# Altium PCB HX-SMJ-03-B.pcbdoc (part 1 of 2)
Units mil, origin at the board's own origin, x right, y up, seen from the top; angles counter-clockwise.
Board outline 10479.57 x 2985.31 mil, 2 copper layers (Top Layer, Bottom Layer); 242 components, 163 nets, 634 pads, 340 vias.
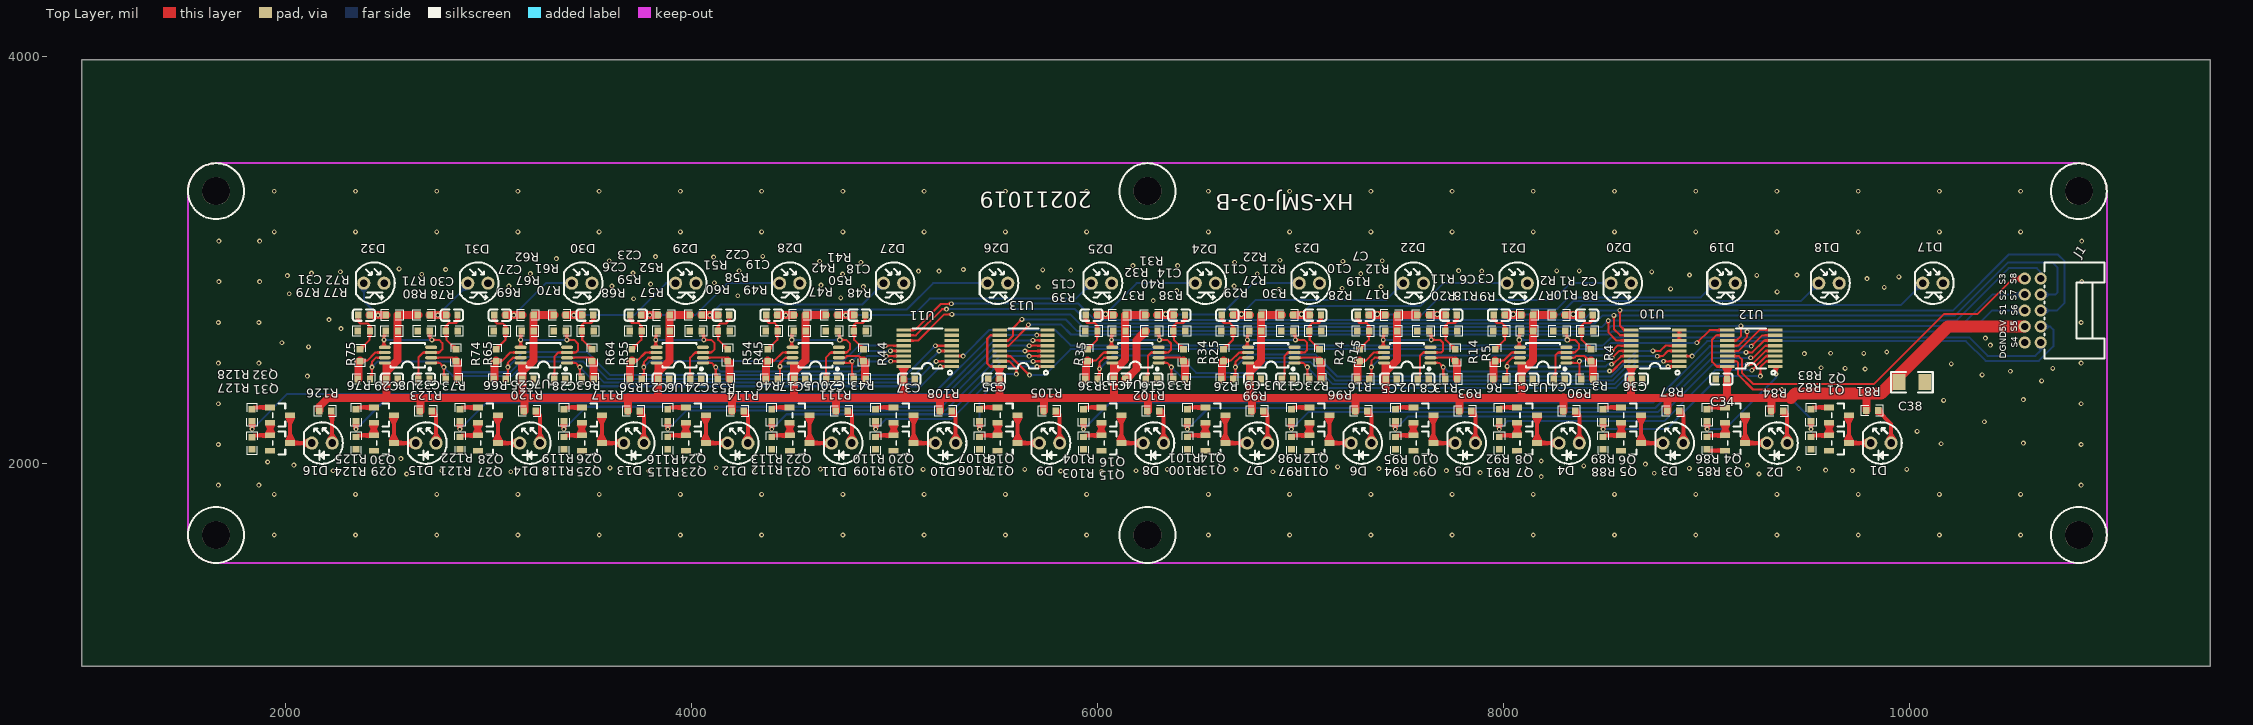
[diagram p0: Top Layer view]
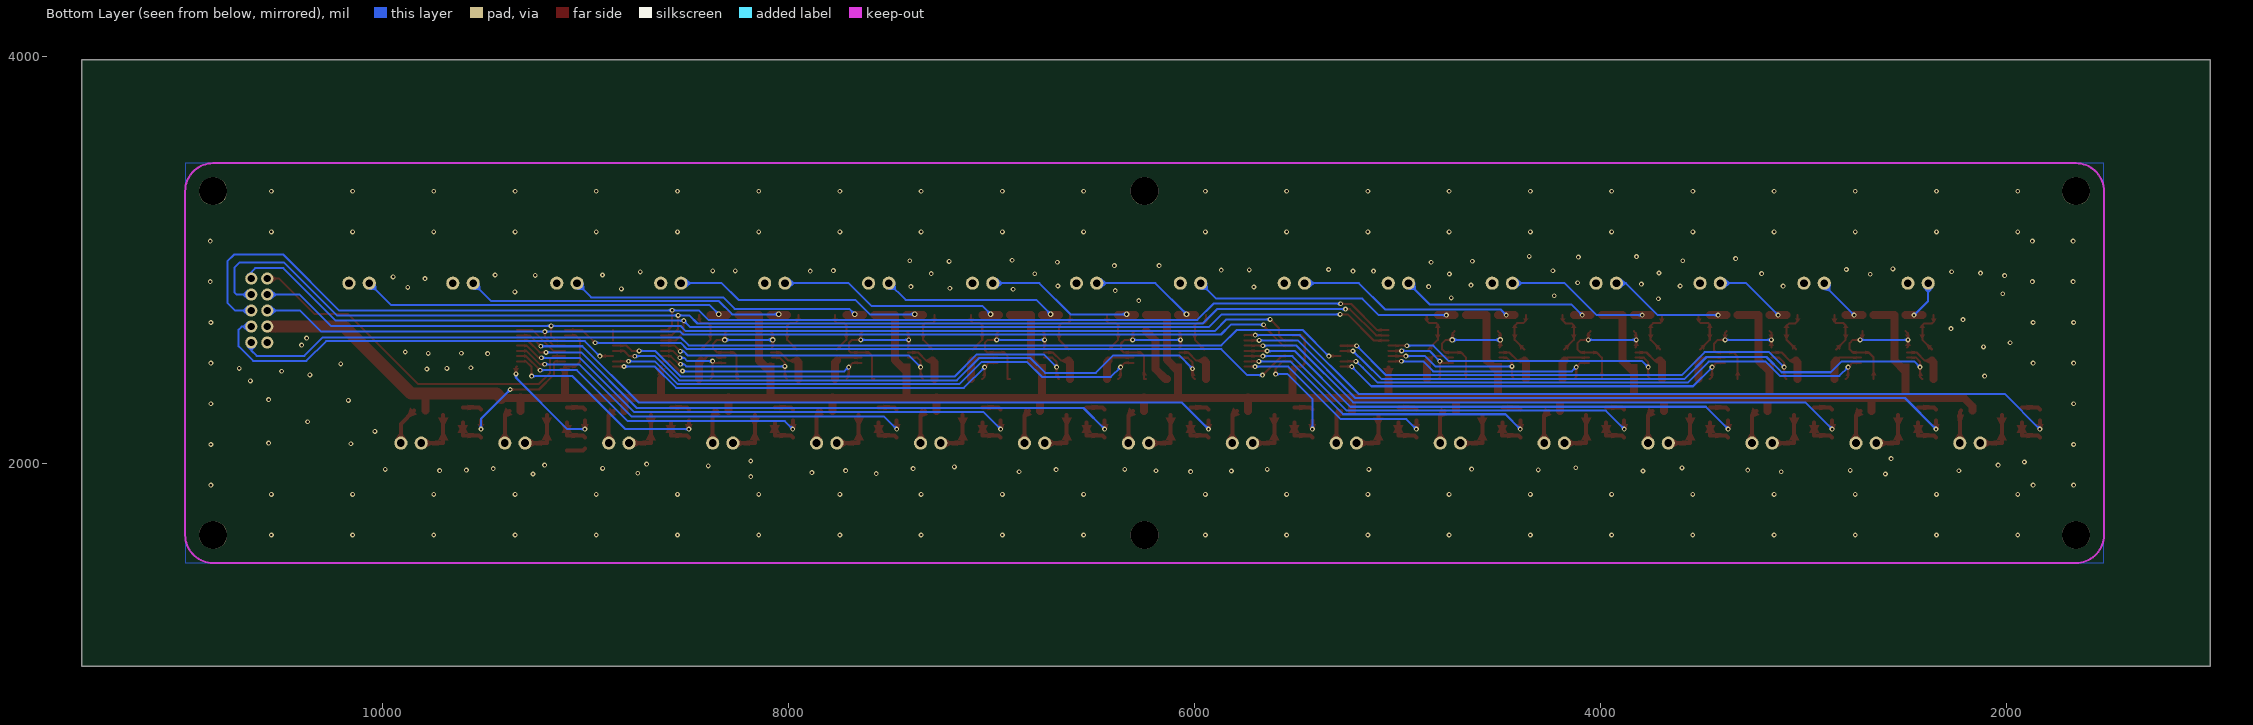
[diagram p1: Bottom Layer view, seen from below]

## Layer stack, top to bottom
Top Layer: signal copper (thickness not stored)
Dielectric: dielectric 12.6, FR-4, Dk 4.8
Bottom Layer: signal copper (thickness not stored)

## Board outline
11479.57,1000 1000,1000 1000,3985.31 11479.57,3985.31

## Components (designator, comment, footprint, x,y, rotation, side; value= is the part's Value field where it differs from the comment)
C1 "100nF" C0603 8117.07,2413.89 r0 top
C2 "1uF" C0603 8412.38,2728.89 r0 top
C3 "1uF" C0603 7979.27,2728.89 r0 top
C4 "100nF" C0603 8274.58,2413.89 r0 top
C5 "100nF" C0603 7447.77,2413.89 r0 top
C6 "1uF" C0603 7743.07,2728.89 r0 top
C7 "1uF" C0603 7309.98,2728.89 r0 top
C8 "100nF" C0603 7605.27,2413.89 r0 top
C9 "100nF" C0603 6778.48,2413.89 r0 top
C10 "1uF" C0603 7073.77,2728.89 r0 top
C11 "1uF" C0603 6640.68,2728.89 r0 top
C12 "100nF" C0603 6935.98,2413.89 r0 top
C13 "100nF" C0603 6109.18,2413.89 r0 top
C14 "1uF" C0603 6404.48,2728.89 r0 top
C15 "1uF" C0603 5971.38,2728.89 r0 top
C16 "100nF" C0603 6266.68,2413.89 r0 top
C17 "100nF" C0603 4534.38,2413.89 r0 top
C18 "1uF" C0603 4829.68,2728.89 r0 top
C19 "1uF" C0603 4396.57,2728.89 r0 top
C20 "100nF" C0603 4691.88,2413.89 r0 top
C21 "100nF" C0603 3865.07,2413.89 r0 top
C22 "1uF" C0603 4160.38,2728.89 r0 top
C23 "1uF" C0603 3727.28,2728.89 r0 top
C24 "100nF" C0603 4022.57,2413.89 r0 top
C25 "100nF" C0603 3195.88,2413.89 r0 top
C26 "1uF" C0603 3491.07,2728.89 r0 top
C27 "1uF" C0603 3058.07,2728.89 r0 top
C28 "100nF" C0603 3353.28,2413.89 r0 top
C29 "100nF" C0603 2526.57,2413.89 r0 top
C30 "1uF" C0603 2821.78,2728.89 r0 top
C31 "1uF" C0603 2388.68,2728.89 r0 top
C32 "100nF" C0603 2683.97,2413.89 r0 top
C34 "100nF" C0603 9073.27,2413.89 r0 top
C35 "100nF" C0603 5490.98,2413.89 r0 top
C36 "100nF" C0603 8656.27,2413.89 r180 top
C37 "100nF" C0603 5073.27,2413.89 r180 top
C38 "47uF" 1206 10011.39,2398.64 r180 top
D1 "IR333C-A" "IR-5MM/2.54-IR333C-A COPY" 9859.2,2098.93 r270 top
D2 "IR333C-A" "IR-5MM/2.54-IR333C-A COPY" 9347.41,2098.93 r270 top
D3 "IR333C-A" "IR-5MM/2.54-IR333C-A COPY" 8835.6,2098.93 r270 top
D4 "IR333C-A" "IR-5MM/2.54-IR333C-A COPY" 8323.81,2098.93 r270 top
D5 "IR333C-A" "IR-5MM/2.54-IR333C-A COPY" 7812.01,2098.93 r270 top
D6 "IR333C-A" "IR-5MM/2.54-IR333C-A COPY" 7300.2,2098.93 r270 top
D7 "IR333C-A" "IR-5MM/2.54-IR333C-A COPY" 6788.33,2098.93 r270 top
D8 "IR333C-A" "IR-5MM/2.54-IR333C-A COPY" 6276.51,2098.93 r270 top
D9 "IR333C-A" "IR-5MM/2.54-IR333C-A COPY" 5764.7,2098.93 r270 top
D10 "IR333C-A" "IR-5MM/2.54-IR333C-A COPY" 5252.9,2098.93 r270 top
D11 "IR333C-A" "IR-5MM/2.54-IR333C-A COPY" 4741.1,2098.93 r270 top
D12 "IR333C-A" "IR-5MM/2.54-IR333C-A COPY" 4229.28,2098.93 r270 top
D13 "IR333C-A" "IR-5MM/2.54-IR333C-A COPY" 3717.47,2098.93 r270 top
D14 "IR333C-A" "IR-5MM/2.54-IR333C-A COPY" 3205.66,2098.93 r270 top
D15 "IR333C-A" "IR-5MM/2.54-IR333C-A COPY" 2693.85,2098.93 r270 top
D16 "IR333C-A" "IR-5MM/2.54-IR333C-A COPY" 2182.03,2098.93 r270 top
D17 "PT334-6B" IR-5MM/2.54-PT334-6B 10115.11,2886.34 r270 top
D18 "PT334-6B" IR-5MM/2.54-PT334-6B 9603.3,2886.34 r270 top
D19 "PT334-6B" IR-5MM/2.54-PT334-6B 9091.52,2886.33 r270 top
D20 "PT334-6B" IR-5MM/2.54-PT334-6B 8579.62,2886.33 r270 top
D21 "PT334-6B" IR-5MM/2.54-PT334-6B 8067.82,2886.33 r270 top
D22 "PT334-6B" IR-5MM/2.54-PT334-6B 7556.02,2886.33 r270 top
D23 "PT334-6B" IR-5MM/2.54-PT334-6B 7044.22,2886.33 r270 top
D24 "PT334-6B" IR-5MM/2.54-PT334-6B 6532.42,2886.33 r270 top
D25 "PT334-6B" IR-5MM/2.54-PT334-6B 6020.62,2886.33 r270 top
D26 "PT334-6B" IR-5MM/2.54-PT334-6B 5508.82,2886.33 r270 top
D27 "PT334-6B" IR-5MM/2.54-PT334-6B 4997.02,2886.33 r270 top
D28 "PT334-6B" IR-5MM/2.54-PT334-6B 4485.22,2886.33 r270 top
D29 "PT334-6B" IR-5MM/2.54-PT334-6B 3973.32,2886.33 r270 top
D30 "PT334-6B" IR-5MM/2.54-PT334-6B 3461.52,2886.33 r270 top
D31 "PT334-6B" IR-5MM/2.54-PT334-6B 2949.72,2886.33 r270 top
D32 "PT334-6B" IR-5MM/2.54-PT334-6B 2437.92,2886.33 r270 top
J1 "PHB-2*5AW" CONN-TH_PHB-2*5AW 10606.37,2751.33 r270 top
Q1 "S9014" SOT-23(SOT-23-3) 9652.5,2098.93 r270 top
Q2 "S9014" SOT-23(SOT-23-3) 9652.5,2236.72 r270 top
Q3 "S9014" SOT-23(SOT-23-3) 9140.69,2098.93 r270 top
Q4 "S9014" SOT-23(SOT-23-3) 9140.69,2236.72 r270 top
Q5 "S9014" SOT-23(SOT-23-3) 8628.88,2098.93 r270 top
Q6 "S9014" SOT-23(SOT-23-3) 8628.88,2236.72 r270 top
Q7 "S9014" SOT-23(SOT-23-3) 8117.07,2098.93 r270 top
Q8 "S9014" SOT-23(SOT-23-3) 8117.07,2236.72 r270 top
Q9 "S9014" SOT-23(SOT-23-3) 7605.25,2098.93 r270 top
Q10 "S9014" SOT-23(SOT-23-3) 7605.26,2236.73 r270 top
Q11 "S9014" SOT-23(SOT-23-3) 7093.45,2098.93 r270 top
Q12 "S9014" SOT-23(SOT-23-3) 7093.45,2236.72 r270 top
Q13 "S9014" SOT-23(SOT-23-3) 6581.64,2098.93 r270 top
Q14 "S9014" SOT-23(SOT-23-3) 6581.64,2236.72 r270 top
Q15 "S9014" SOT-23(SOT-23-3) 6069.83,2098.93 r270 top
Q16 "S9014" SOT-23(SOT-23-3) 6069.83,2236.72 r270 top
Q17 "S9014" SOT-23(SOT-23-3) 5558.02,2098.93 r270 top
Q18 "S9014" SOT-23(SOT-23-3) 5558.02,2236.72 r270 top
Q19 "S9014" SOT-23(SOT-23-3) 5046.2,2098.93 r270 top
Q20 "S9014" SOT-23(SOT-23-3) 5046.2,2236.72 r270 top
Q21 "S9014" SOT-23(SOT-23-3) 4534.66,2098.94 r270 top
Q22 "S9014" SOT-23(SOT-23-3) 4534.4,2236.73 r270 top
Q23 "S9014" SOT-23(SOT-23-3) 4022.58,2098.93 r270 top
Q24 "S9014" SOT-23(SOT-23-3) 4022.58,2236.72 r270 top
Q25 "S9014" SOT-23(SOT-23-3) 3510.77,2098.93 r270 top
Q26 "S9014" SOT-23(SOT-23-3) 3510.77,2236.72 r270 top
Q27 "S9014" SOT-23(SOT-23-3) 2998.95,2098.93 r270 top
Q28 "S9014" SOT-23(SOT-23-3) 2998.96,2236.72 r270 top
Q29 "S9014" SOT-23(SOT-23-3) 2487.15,2098.93 r270 top
Q30 "S9014" SOT-23(SOT-23-3) 2487.15,2236.72 r270 top
Q31 "S9014" SOT-23(SOT-23-3) 1975.34,2098.93 r270 top
Q32 "S9014" SOT-23(SOT-23-3) 1975.34,2236.72 r270 top
R1 "8.2K" R0603 8274.58,2728.89 r0 top
R2 "8.2K" R0603 8117.07,2728.89 r180 top
R3 "100K" R0603 8412.38,2413.89 r0 top
R4 "1K" R0603 8431.98,2531.99 r90 top
R5 "1K" R0603 7959.57,2531.99 r270 top
R6 "100K" R0603 7979.27,2413.89 r0 top
R7 "24K" R0603 8117.07,2650.09 r0 top
R8 "100K" R0603 8412.38,2650.09 r180 top
R9 "100K" R0603 7979.27,2650.09 r0 top
R10 "3K" R0603 8274.58,2650.09 r180 top
R11 "8.2K" R0603 7605.27,2728.89 r0 top
R12 "8.2K" R0603 7447.77,2728.89 r180 top
R13 "100K" R0603 7743.07,2413.89 r0 top
R14 "1K" R0603 7762.77,2531.99 r90 top
R15 "1K" R0603 7290.27,2531.99 r270 top
R16 "100K" R0603 7309.98,2413.89 r0 top
R17 "24K" R0603 7447.77,2650.09 r0 top
R18 "100K" R0603 7743.07,2650.09 r180 top
R19 "100K" R0603 7309.98,2650.09 r0 top
R20 "3K" R0603 7605.27,2650.09 r180 top
R21 "8.2K" R0603 6935.98,2728.89 r0 top
R22 "8.2K" R0603 6778.48,2728.89 r180 top
R23 "100K" R0603 7073.77,2413.89 r0 top
R24 "1K" R0603 7093.48,2531.99 r90 top
R25 "1K" R0603 6620.98,2531.99 r270 top
R26 "100K" R0603 6640.68,2413.89 r0 top
R27 "24K" R0603 6778.48,2650.09 r0 top
R28 "100K" R0603 7073.77,2650.09 r180 top
R29 "100K" R0603 6640.68,2650.09 r0 top
R30 "3K" R0603 6935.98,2650.09 r180 top
R31 "8.2K" R0603 6266.68,2728.89 r0 top
R32 "8.2K" R0603 6109.18,2728.89 r180 top
R33 "100K" R0603 6404.48,2413.89 r0 top
R34 "1K" R0603 6424.18,2531.99 r90 top
R35 "1K" R0603 5951.68,2531.99 r270 top
R36 "100K" R0603 5971.38,2413.89 r0 top
R37 "24K" R0603 6109.18,2650.09 r0 top
R38 "100K" R0603 6404.48,2650.09 r180 top
R39 "100K" R0603 5971.38,2650.09 r0 top
R40 "3K" R0603 6266.68,2650.09 r180 top
R41 "8.2K" R0603 4691.88,2728.89 r0 top
R42 "8.2K" R0603 4534.38,2728.89 r180 top
R43 "100K" R0603 4829.68,2413.89 r0 top
R44 "1K" R0603 4849.38,2531.99 r90 top
R45 "1K" R0603 4376.88,2531.99 r270 top
R46 "100K" R0603 4396.57,2413.89 r0 top
R47 "24K" R0603 4534.38,2650.09 r0 top
R48 "100K" R0603 4829.68,2650.09 r180 top
R49 "100K" R0603 4396.57,2650.09 r0 top
R50 "3K" R0603 4691.88,2650.09 r180 top
R51 "8.2K" R0603 4022.57,2728.89 r0 top
R52 "8.2K" R0603 3865.07,2728.89 r180 top
R53 "100K" R0603 4160.38,2413.89 r0 top
R54 "1K" R0603 4180.07,2531.99 r90 top
R55 "1K" R0603 3707.57,2531.99 r270 top
R56 "100K" R0603 3727.28,2413.89 r0 top
R57 "24K" R0603 3865.07,2650.09 r0 top
R58 "100K" R0603 4160.38,2650.09 r180 top
R59 "100K" R0603 3727.28,2650.09 r0 top
R60 "3K" R0603 4022.57,2650.09 r180 top
R61 "8.2K" R0603 3353.28,2728.89 r0 top
R62 "8.2K" R0603 3195.88,2728.89 r180 top
R63 "100K" R0603 3491.07,2413.89 r0 top
R64 "1K" R0603 3510.78,2531.99 r90 top
R65 "1K" R0603 3038.38,2531.99 r270 top
R66 "100K" R0603 3058.07,2413.89 r0 top
R67 "24K" R0603 3195.88,2650.09 r0 top
R68 "100K" R0603 3491.07,2650.09 r180 top
R69 "100K" R0603 3058.07,2650.09 r0 top
R70 "3K" R0603 3353.28,2650.09 r180 top
R71 "8.2K" R0603 2683.97,2728.89 r0 top
R72 "8.2K" R0603 2526.57,2728.89 r180 top
R73 "100K" R0603 2821.78,2413.89 r0 top
R74 "1K" R0603 2841.47,2531.99 r90 top
R75 "1K" R0603 2369.07,2531.99 r270 top
R76 "100K" R0603 2388.68,2413.89 r0 top
R77 "24K" R0603 2526.47,2650.09 r0 top
R78 "100K" R0603 2821.78,2650.09 r180 top
R79 "100K" R0603 2388.68,2650.09 r0 top
R80 "3K" R0603 2683.97,2650.09 r180 top
R81 "91" R0603 9816.58,2258.69 r0 top
R82 "1K" R0603 9514.67,2098.89 r270 top
R83 "22K" R0603 9514.67,2236.69 r90 top
R84 "91" R0603 9347.38,2256.39 r0 top
R85 "1K" R0603 9002.88,2098.89 r270 top
R86 "22K" R0603 9002.88,2236.69 r90 top
R87 "91" R0603 8835.58,2256.39 r0 top
R88 "1K" R0603 8491.08,2098.89 r270 top
R89 "22K" R0603 8491.08,2236.69 r90 top
R90 "91" R0603 8323.77,2256.39 r0 top
R91 "1K" R0603 7979.27,2098.89 r270 top
R92 "22K" R0603 7979.27,2236.69 r90 top
R93 "91" R0603 7811.98,2256.39 r0 top
R94 "1K" R0603 7467.48,2098.89 r270 top
R95 "22K" R0603 7467.48,2236.69 r90 top
R96 "91" R0603 7300.18,2256.39 r0 top
R97 "1K" R0603 6955.68,2098.89 r270 top
R98 "22K" R0603 6955.68,2236.69 r90 top
R99 "91" R0603 6788.38,2256.39 r0 top
R100 "1K" R0603 6443.88,2098.89 r270 top
R101 "22K" R0603 6443.88,2236.69 r90 top
R102 "91" R0603 6276.48,2256.39 r0 top
R103 "1K" R0603 5932.07,2098.89 r270 top
R104 "22K" R0603 5932.07,2236.69 r90 top
R105 "91" R0603 5764.68,2256.39 r0 top
R106 "1K" R0603 5420.18,2098.89 r270 top
R107 "22K" R0603 5420.27,2236.69 r90 top
R108 "91" R0603 5252.88,2256.39 r0 top
R109 "1K" R0603 4908.38,2098.89 r270 top
R110 "22K" R0603 4908.38,2236.69 r90 top
R111 "91" R0603 4741.07,2256.39 r0 top
R112 "1K" R0603 4396.57,2098.89 r270 top
R113 "22K" R0603 4396.57,2236.69 r90 top
R114 "91" R0603 4229.27,2256.39 r0 top
R115 "1K" R0603 3884.78,2098.89 r270 top
R116 "22K" R0603 3884.78,2236.69 r90 top
R117 "91" R0603 3717.47,2256.39 r0 top
R118 "1K" R0603 3372.97,2098.89 r270 top
R119 "22K" R0603 3372.97,2236.69 r90 top
R120 "91" R0603 3205.68,2256.39 r0 top
R121 "1K" R0603 2861.18,2098.89 r270 top
R122 "22K" R0603 2861.18,2236.69 r90 top
R123 "91" R0603 2693.88,2256.39 r0 top
R124 "1K" R0603 2349.38,2098.89 r270 top
R125 "22K" R0603 2349.38,2236.69 r90 top
R126 "91" R0603 2198.57,2256.42 r0 top
R127 "1K" R0603 1837.53,2098.89 r270 top
R128 "22K" R0603 1837.53,2236.68 r90 top
U1 "LM358PWR" TSSOP-8_L4.4-W3.0-P0.65-LS6.4-BL 8195.83,2531.99 r90 top
U2 "LM358PWR" TSSOP-8_L4.4-W3.0-P0.65-LS6.4-BL 7526.53,2532 r90 top
U3 "LM358PWR" TSSOP-8_L4.4-W3.0-P0.65-LS6.4-BL 6857.23,2532.01 r90 top
U4 "LM358PWR" TSSOP-8_L4.4-W3.0-P0.65-LS6.4-BL 6187.92,2532.01 r90 top
U5 "LM358PWR" TSSOP-8_L4.4-W3.0-P0.65-LS6.4-BL 4613.15,2532.01 r90 top
U6 "LM358PWR" TSSOP-8_L4.4-W3.0-P0.65-LS6.4-BL 3943.83,2532.01 r90 top
U7 "LM358PWR" TSSOP-8_L4.4-W3.0-P0.65-LS6.4-BL 3274.56,2532.01 r90 top
U8 "LM358PWR" TSSOP-8_L4.4-W3.0-P0.65-LS6.4-BL 2605.26,2532.02 r90 top
U10 "SN74LV4051APWR" TSSOP-16_L5.0-W4.4-P0.65-LS6.4-BL 8746.99,2565.47 r90 top
U11 "SN74LV4051APWR" TSSOP-16_L5.0-W4.4-P0.65-LS6.4-BL 5164.32,2565.47 r90 top
U12 "SN74HC595PWR" TSSOP-16_L5.0-W4.4-P0.65-LS6.4-BL 9219.43,2565.47 r90 top
U13 "SN74HC595PWR" TSSOP-16_L5.0-W4.4-P0.65-LS6.4-BL 5636.76,2565.47 r90 top

## Footprints (in the part's own frame and the unit in brackets; to place one, negate y for a bottom-side part, rotate by r counter-clockwise, add the part's x,y. Pads: shape width x height; smd on the part's side, far side on the other; paste and mask are expansions set on the pad)
1206 [mil]
  rect 63x78.74 smd: 1(-62.99,0) 2(62.99,0)
  silkscreen extent -103,-50 103,50
C0603 [mm]
  rect 0.8x0.9 smd: 1(-0.7,0) 2(0.7,0)
  silkscreen extent -1.41,-0.71 1.39,0.72
CONN-TH_PHB-2*5AW [mil]
  round 60 hole 36: 1(-157.48,-39.33) 2(-157.48,39.37) 3(-78.78,-39.33) 4(-78.78,39.37) 5(0,-39.37) 6(0,39.37) 7(78.74,-39.37) 8(78.74,39.37) 9(157.48,-39.37) 10(157.48,39.37)
  silkscreen extent -236,59 236,354
"IR-5MM/2.54-IR333C-A COPY" [mil]
  round 65 hole 38: 1(0,50) 2(0,-50)
  silkscreen extent -102,-88 102,102
IR-5MM/2.54-PT334-6B [mil]
  round 65 hole 38: 1(0,50) 2(0,-50)
  silkscreen extent -102,-88 102,102
R0603 [mil]
  rect 31.75x34.02 smd: 1(-29.66,0) 2(29.65,0)
  silkscreen extent -55,-26 55,26
SOT-23(SOT-23-3) [mm]
  rect 0.7x1.25 smd: 1(-0.95,-1.25) 2(0.95,-1.25) 3(0,1.25)
  silkscreen extent -1.46,-0.9 1.46,0.65
TSSOP-8_L4.4-W3.0-P0.65-LS6.4-BL [mm]
  oval 0.4x1.5 smd: 1(-0.975,-2.9) 2(-0.325,-2.9) 3(0.325,-2.9) 4(0.975,-2.9) 5(0.975,2.9) 6(0.325,2.9) 7(-0.325,2.9) 8(-0.975,2.9)
  silkscreen extent -1.89,-2.87 1.49,2.16
TSSOP-16_L5.0-W4.4-P0.65-LS6.4-BL [mil]
  rect 16x71 smd: 1(-89.57,-118.11) 2(-63.98,-118.11) 3(-38.39,-118.11) 4(-12.8,-118.11) 5(12.79,-118.11) 6(38.39,-118.11) 7(63.97,-118.11) 8(89.57,-118.11) 9(89.57,118.11) 10(63.97,118.11) 11(38.39,118.11) 12(12.79,118.11) 13(-12.8,118.11) 14(-38.39,118.11) 15(-63.98,118.11) 16(-89.57,118.11)
  silkscreen extent -130,-120 98,74

## Free pads (board coordinates)
  round 137.8 hole 137.8 unplated: ""(1660.38,1646.2) ""(1660.38,3339.11) ""(6246.99,1646.2) ""(6246.99,3339.11) ""(10833.6,1646.2) ""(10833.6,3339.11)

## Via types
v1: diameter 24, hole 12, Top Layer to Bottom Layer, 328 vias
v2: diameter 27.56, hole 15.75, Top Layer to Bottom Layer, 12 vias

## Nets (pads, with @x,y where several pads share a name; then routed paths per layer and width w, separated by ;. In a path a pad name is that pad's centre, name@x,y a point inside that pad or via, vN(x,y) a via of type N, cw(c..) or ccw(c..) an arc to the next point about the centre after c; other vN are vias at no path point)
A: J1.2 U10.11 U11.11 | length 6026.7
  Top Layer w10: U11.11@5046.18,2603.79 5117.48,2603.79 5246.27,2732.59 ; 5246.29,2732.64 v1(5284.27,2732.64) ; v1(8516.26,2701.64) 8516.27,2643.69 8556.08,2603.89 U10.11@8628.88,2603.86
  Bottom Layer w10: v1(5284.27,2732.64) 5867.23,2732.64 5930.26,2669.61 8484.24,2669.61 v1(8516.26,2701.64) ; v1(8516.26,2701.64) 10229.67,2701.59 10488.38,2960.39 10626.38,2960.39 10645.77,2940.99 J1.2@10645.77,2908.89
B: J1.4 U10.10 U11.10 | length 6275.2
  Top Layer w10: U11.10@5046.18,2629.49 5106.57,2629.49 5235.77,2758.69 ; 5235.81,2758.64 v1(5257.27,2758.64) ; v1(8544.26,2727.64) 8544.27,2659.59 8574.48,2629.49 U10.10@8628.88,2629.49
  Bottom Layer w10: v1(5257.27,2758.64) 5890.23,2758.64 5961.26,2687.61 8448.26,2687.61 8488.29,2727.64 v1(8544.26,2727.64) ; v1(8544.26,2727.64) 10224.77,2727.59 10485.58,2988.39 10703.39,2988.39 10729.39,2962.39 10729.39,2842.39 10717.16,2830.15 J1.4@10645.77,2830.15
C: J1.6 U10.9 U11.9 | length 6430.3
  Top Layer w10: U11.9@5046.21,2655.04 5100.68,2654.99 5230.27,2784.59 ; 5230.26,2784.61 v1(5281.27,2784.64) ; v1(8573.26,2752.64) 8573.27,2676.59 8594.88,2654.99 U10.9@8628.88,2655.04
  Bottom Layer w10: v1(5281.27,2784.64) 5282.27,2785.64 5907.23,2785.64 5987.26,2705.61 8394.86,2705.61 8441.89,2752.64 v1(8573.26,2752.64) ; v1(8573.26,2752.64) 10214.58,2752.59 10489.38,3027.39 10730.38,3027.39 10763.38,2994.39 10763.38,2789.39 10725.38,2751.39 J1.6@10645.77,2751.39
C2_1: C2.1 D17.2 R1.2 | length 1867.9
  Top Layer w39.37: R1.2@8302.08,2728.89 8344.88,2728.89 C2.1@8384.82,2728.89
  Bottom Layer w10: v2(8343.45,2732.8) 8388.3,2777.64 9956.42,2777.64 D17.2@10065.11,2886.34
C7_1: C7.1 R15.1 R19.2 | length 233.3
  Top Layer w10: C7.1@7282.42,2728.89 7282.38,2697.69 7290.77,2689.29 7327.77,2689.29 7337.48,2679.59 7337.48,2650.09 7337.48,2606.79 R15.1@7290.27,2559.59
C11_1: C11.1 R25.1 R29.2 | length 229.4
  Top Layer w10: C11.1@6613.12,2728.89 6613.07,2699.99 6623.77,2689.29 6653.77,2689.29 6668.27,2674.89 6668.27,2650.09 6668.27,2606.79 R25.1@6620.98,2559.59
C15_1: C15.1 R35.1 R39.2 | length 234.2
  Top Layer w10: C15.1@5943.88,2728.89 5943.88,2695.99 5950.27,2689.59 5988.48,2689.59 5998.98,2679.19 5998.98,2650.09 5998.98,2606.79 R35.1@5951.68,2559.59
C19_1: C19.1 R45.1 R49.2 | length 229.4
  Top Layer w10: C19.1@4369.02,2728.89 4368.98,2702.39 4381.77,2689.69 4411.77,2689.69 4424.18,2677.29 4424.18,2650.09 4424.18,2606.79 R45.1@4376.88,2559.59
C23_1: C23.1 R55.1 R59.2 | length 231.1
  Top Layer w10: C23.1@3699.78,2728.89 3699.78,2698.69 3708.78,2689.69 3741.78,2689.69 3754.88,2676.59 3754.88,2650.09 3754.88,2606.79 R55.1@3707.57,2559.59
C27_1: C27.1 R65.1 R69.2 | length 229.8
  Top Layer w10: C27.1@3030.52,2728.89 3030.47,2699.99 3041.78,2688.69 3072.78,2688.69 3085.57,2675.89 3085.57,2650.09 3085.57,2606.79 R65.1@3038.38,2559.59
C31_1: C31.1 R75.1 R79.2 | length 233.3
  Top Layer w10: C31.1@2361.18,2728.89 2361.18,2696.79 2369.28,2688.69 2406.28,2688.69 2416.28,2678.59 2416.28,2650.09 2416.28,2606.79 R75.1@2369.07,2559.59
D2_1: D2.1 R84.2 | length 166.8
  Top Layer w19.68: R84.2@9374.98,2256.39 9397.38,2233.99 D2.1@9397.41,2098.93
D2_2: D2.2 Q3.3 Q4.3 | length 245.3
  Top Layer w19.68: Q4.3@9189.89,2236.73 Q3.3@9189.89,2098.93 D2.2@9297.41,2098.93
D3_1: D3.1 R87.2 | length 166.8
  Top Layer w19.68: R87.2@8863.17,2256.39 8885.58,2233.99 D3.1@8885.6,2098.93
D3_2: D3.2 Q5.3 Q6.3 | length 245.3
  Top Layer w19.68: Q6.3@8678.08,2236.73 Q5.3@8678.08,2098.93 D3.2@8785.6,2098.93
D4_1: D4.1 R90.2 | length 166.8
  Top Layer w19.68: R90.2@8351.27,2256.39 8373.77,2233.89 D4.1@8373.81,2098.93
D4_2: D4.2 Q7.3 Q8.3 | length 245.3
  Top Layer w19.68: Q8.3@8166.27,2236.72 Q7.3@8166.27,2098.93 D4.2@8273.81,2098.93
D5_1: D5.1 R93.2 | length 166.8
  Top Layer w19.68: R93.2@7839.48,2256.39 7861.98,2233.99 D5.1@7862.01,2098.93
D5_2: D5.2 Q9.3 Q10.3 | length 245.3
  Top Layer w19.68: Q10.3@7654.46,2236.73 Q9.3@7654.45,2098.93 D5.2@7762.01,2098.93
D6_1: D6.1 R96.2 | length 166.8
  Top Layer w19.68: R96.2@7327.68,2256.39 7350.18,2233.99 D6.1@7350.2,2098.93
D6_2: D6.2 Q11.3 Q12.3 | length 245.3
  Top Layer w19.68: Q12.3@7142.68,2236.69 7142.68,2098.89 D6.2@7250.2,2098.93
D7_1: D7.1 R99.2 | length 166.8
  Top Layer w19.68: R99.2@6815.88,2256.39 6838.38,2233.99 D7.1@6838.38,2098.89
D7_2: D7.2 Q13.3 Q14.3 | length 245.3
  Top Layer w19.68: Q14.3@6630.88,2236.69 6630.88,2098.89 D7.2@6738.38,2098.89
D8_1: D8.1 R102.2 | length 166.8
  Top Layer w19.68: R102.2@6304.07,2256.39 6326.48,2233.99 D8.1@6326.51,2098.93
D8_2: D8.2 Q15.3 Q16.3 | length 245.3
  Top Layer w19.68: Q16.3@6119.03,2236.72 Q15.3@6119.03,2098.93 D8.2@6226.51,2098.93
D9_1: D9.1 R105.2 | length 166.8
  Top Layer w19.68: R105.2@5792.27,2256.39 5814.68,2233.99 D9.1@5814.7,2098.93
D9_2: D9.2 Q17.3 Q18.3 | length 245.3
  Top Layer w19.68: Q17.3@5607.22,2098.93 D9.2@5714.7,2098.93 ; Q17.3@5607.18,2098.99 Q18.3@5607.27,2236.79
D10_1: D10.1 R108.2 | length 166.8
  Top Layer w19.68: R108.2@5280.48,2256.39 5302.88,2233.99 D10.1@5302.9,2098.93
D10_2: D10.2 Q19.3 Q20.3 | length 245.3
  Top Layer w19.68: Q20.3@5095.48,2236.69 Q19.3@5095.4,2098.93 D10.2@5202.9,2098.93
D11_1: D11.1 R111.2 | length 166.8
  Top Layer w19.68: R111.2@4768.68,2256.39 4791.07,2233.99 D11.1@4791.1,2098.93
D11_2: D11.2 Q21.3 Q22.3 | length 244.9
  Top Layer w19.68: Q22.3@4583.6,2236.73 4583.88,2098.99 D11.2@4691.1,2098.93
D12_1: D12.1 R114.2 | length 166.8
  Top Layer w19.68: R114.2@4256.88,2256.39 4279.27,2233.99 D12.1@4279.28,2098.93
D12_2: D12.2 Q23.3 Q24.3 | length 245.3
  Top Layer w19.68: Q24.3@4071.78,2236.72 Q23.3@4071.78,2098.93 D12.2@4179.28,2098.93
D13_1: D13.1 R117.2 | length 166.8
  Top Layer w19.68: R117.2@3744.97,2256.39 3767.47,2233.99 D13.1@3767.47,2098.93
D13_2: D13.2 Q25.3 Q26.3 | length 245.3
  Top Layer w19.68: Q26.3@3559.97,2236.72 Q25.3@3559.97,2098.93 D13.2@3667.47,2098.93
D14_1: D14.1 R120.2 | length 166.8
  Top Layer w19.68: R120.2@3233.18,2256.39 3255.68,2233.99 D14.1@3255.66,2098.93
D14_2: D14.2 Q27.3 Q28.3 | length 245.3
  Top Layer w19.68: Q28.3@3048.16,2236.72 Q27.3@3048.16,2098.93 D14.2@3155.66,2098.93
D15_1: D15.1 R123.2 | length 166.8
  Top Layer w19.68: R123.2@2721.38,2256.39 2743.88,2233.99 D15.1@2743.88,2098.89
D15_2: D15.2 Q29.3 Q30.3 | length 245.3
  Top Layer w19.68: Q30.3@2536.35,2236.72 Q29.3@2536.35,2098.93 D15.2@2643.88,2098.89
D16_1: D16.1 R126.2 | length 162.3
  Top Layer w19.68: R126.2@2226.07,2258.69 2232.07,2252.69 D16.1@2232.07,2098.89
D16_2: D16.2 Q31.3 Q32.3 | length 245.2
  Top Layer w19.68: Q32.3@2024.58,2236.69 2024.58,2098.89 D16.2@2132.03,2098.93
D19_2: C6.1 D19.2 R11.2 | length 1513.6
  Top Layer w39.37: R11.2@7632.77,2728.89 C6.1@7715.52,2728.89
  Bottom Layer w10: v2(7674.15,2732.8) 7701.01,2759.64 8265.36,2759.64 8322.36,2816.64 8971.84,2816.64 D19.2@9041.52,2886.32
D20_2: C7.2 D20.2 R12.2 | length 1297
  Top Layer w39.37: C7.2@7337.53,2728.89 R12.2@7420.18,2728.89
  Bottom Layer w10: v2(7378.89,2732.8) 7599.73,2732.8 7670.57,2803.64 8246.57,2803.64 8329.25,2886.32 D20.2@8529.62,2886.32
D21_2: C10.1 D21.2 R21.2 | length 1159.2
  Top Layer w39.37: R21.2@6963.48,2728.89 C10.1@7046.22,2728.89
  Bottom Layer w10: v2(7004.86,2732.8) 7044.71,2772.64 7590.57,2772.64 7704.25,2886.32 D21.2@8017.82,2886.32
D22_2: C11.2 D22.2 R22.2 | length 942.7
  Top Layer w39.37: C11.2@6668.27,2728.89 R22.2@6750.98,2728.89
  Bottom Layer w10: v2(6709.6,2732.8) 6780.44,2803.64 7423.34,2803.64 D22.2@7506.02,2886.32
D23_2: C14.1 D23.2 R31.2 | length 804.8
  Top Layer w39.37: R31.2@6294.27,2728.89 C14.1@6376.92,2728.89
  Bottom Layer w10: v2(6335.57,2732.8) 6611.73,2732.8 6765.25,2886.32 D23.2@6994.22,2886.32
D24_2: C15.2 D24.2 R32.2 | length 588.4
  Top Layer w39.37: C15.2@5998.98,2728.89 R32.2@6081.68,2728.89
  Bottom Layer w10: v2(6040.3,2732.8) 6193.82,2886.32 D24.2@6482.42,2886.32
D25_2: C18.1 D25.2 R41.2 | length 1357.8
  Top Layer w39.37: R41.2@4719.38,2728.89 4760.07,2728.89 C18.1@4802.12,2728.89
  Bottom Layer w10: v1(4760.77,2728.87) 5093.88,2728.89 5174.68,2809.69 5893.98,2809.69 D25.2@5970.57,2886.39
D26_2: C19.2 D26.2 R42.2 | length 1141.2
  Top Layer w39.37: C19.2@4424.18,2728.89 4465.88,2728.89 R42.2@4506.88,2728.89
  Bottom Layer w10: v1(4465.49,2728.87) 4493.27,2756.69 5061.68,2756.69 5191.38,2886.29 D26.2@5458.82,2886.32
D27_2: C22.1 D27.2 R51.2 | length 1003.3
  Top Layer w39.37: R51.2@4050.18,2728.89 4091.18,2728.89 C22.1@4132.82,2728.89
  Bottom Layer w10: v1(4091.49,2728.87) 4143.26,2780.64 4841.34,2780.64 D27.2@4947.02,2886.32
D28_2: C23.2 D28.2 R52.2 | length 786.9
  Top Layer w39.37: C23.2@3754.88,2728.89 3796.78,2728.89 R52.2@3837.57,2728.89
  Bottom Layer w10: v1(3796.2,2728.86) 4020.79,2728.86 4178.25,2886.32 D28.2@4435.22,2886.32
D29_2: C26.1 D29.2 R61.2 | length 648.9
  Top Layer w39.37: R61.2@3380.88,2728.89 3422.78,2728.89 C26.1@3463.47,2728.79
  Bottom Layer w10: v1(3422.18,2728.86) 3718.79,2728.86 3876.25,2886.32 D29.2@3923.32,2886.32
D30_2: C27.2 D30.2 R62.2 | length 432.5
  Top Layer w39.37: C27.2@3085.57,2728.79 3126.78,2728.89 R62.2@3168.28,2728.89
  Bottom Layer w10: v1(3126.91,2728.86) 3284.39,2886.32 D30.2@3411.52,2886.32
D31_2: C30.1 D31.2 R71.2 | length 300.9
  Top Layer w39.37: R71.2@2711.57,2728.89 2753.07,2728.89 C30.1@2794.18,2728.79
  Bottom Layer w10: v1(2752.89,2728.86) 2899.71,2875.67 D31.2@2899.72,2886.32
D32_2: C31.2 D32.2 R72.2 | length 269
  Top Layer w39.37: C31.2@2416.28,2728.89 2458.57,2728.89 R72.2@2498.97,2728.89
  Bottom Layer w10: D32.2@2387.92,2886.32 2387.93,2798.59 v1(2457.62,2728.87)
GND: C1.2 C4.2 C5.2 C8.2 C9.2 C12.2 C13.2 C16.2 C17.2 C20.2 C21.2 C24.2 C25.2 C28.2 C29.2 C32.2 C34.1 C35.1 C36.1 C37.1 C38.1 D17.1 D18.1 D19.1 D20.1 D21.1 D22.1 D23.1 D24.1 D25.1 D26.1 D27.1 D28.1 D29.1 D30.1 D31.1 D32.1 J1.9 Q1.2 Q3.2 Q5.2 Q7.2 Q9.2 Q11.2 Q13.2 Q15.2 Q17.2 Q19.2 Q21.2 Q23.2 Q25.2 Q27.2 Q29.2 Q31.2 R8.1 R9.1 R10.2 R18.1 R19.1 R20.2 R28.1 R29.1 R30.2 R38.1 R39.1 R40.2 R48.1 R49.1 R50.2 R58.1 R59.1 R60.2 R68.1 R69.1 R70.2 R78.1 R79.1 R80.2 R82.2 R85.2 R88.2 R91.2 R94.2 R97.2 R100.2 R103.2 R106.2 R109.2 R112.2 R115.2 R118.2 R121.2 R124.2 R127.2 U1.4 U2.4 U3.4 U4.4 U5.4 U6.4 U7.4 U8.4 U10.6 U10.7 U10.8 U11.6 U11.7 U11.8 U12.8 U12.13 U13.8 U13.13 | length 704.7
  Top Layer w10: U10.6@8865.1,2603.86 U10.8@8865.08,2655.09 ; U12.13@9101.38,2552.69 9158.27,2552.69 9260.67,2654.99 U12.8@9337.58,2654.99
  Top Layer w19.68: R85.2@9002.88,2071.39 9012.77,2061.49 Q3.2@9091.49,2061.53
  Top Layer w39.37: C13.2@6136.77,2413.89 6143.07,2413.89 6193.77,2464.69 6193.77,2604.79 R40.2@6239.07,2650.09
  other v1: 1946.99,1646.2 2346.99,1646.2 2746.99,1646.2 3146.99,1646.2 3546.99,1646.2 3946.99,1646.2 4346.99,1646.2 4746.99,1646.2 5146.99,1646.2 5546.99,1646.2 5946.99,1646.2 6547.01,1646.2 6947.01,1646.2 7347.01,1646.2 7747.01,1646.2 8147.01,1646.2 8547,1646.2 8947,1646.2 9347,1646.2 9747,1646.2 10147,1646.2 10547,1646.2 1946.99,1846.2 2346.99,1846.2 2746.99,1846.2 3146.99,1846.2 3546.99,1846.2 3946.99,1846.2 4346.99,1846.2 4746.99,1846.2 5146.99,1846.2 5546.99,1846.2 5946.99,1846.2 6547.01,1846.2 6947.01,1846.2 7347.01,1846.2 7747.01,1846.2 8147.01,1846.2 8547,1846.2 8947,1846.2 9347,1846.2 9747,1846.2 10147,1846.2 10547,1846.2 1671.39,1891.67 1871.39,1891.67 10844.61,1891.67 8186.4,1933.39 2598.39,1946.39 9258.4,1946.39 7568.4,1948.39 8742.4,1950.39 7885.4,1953.39 3111.39,1957.39 6864.4,1957.39 6020.4,1958.39 3792.39,1961.39 5819.4,1961.39 2236.39,1962.39 6190.4,1962.39 7719.4,1963.39 9718.4,1963.39 2771.39,1964.39 3276.39,1965.39 9586.4,1965.39 4308.4,1966.39 6682.4,1968.39 5142.4,1969.39 5642.4,1969.39 6344.4,1969.39 9986.4,1969.39 4636.4,1970.39 7386.4,1973.39 9454.4,1973.39 8915.4,1974.39 3600.39,1976.39 4123.4,1977.39 7183.4,1981.39 8395.4,1986.39 2043.39,1990.39 9201.4,1990.39 8699.4,1995.39 1914.39,2005.64 8186.4,2010.39 2570.39,2022.39 1671.39,2091.67 10844.61,2091.67 10155.4,2095.64 10560.4,2098.64 10037.4,2156.64 10368.4,2203.64 1671.39,2292.67 10844.61,2292.67 10167.4,2308.64 10560.4,2312.64 10650.4,2404.64 2110.39,2428.64 10357.4,2434.64 10496.4,2452.39 9781.4,2463.39 9682.4,2466.39 10705.4,2466.39 9564.4,2469.39 10205.4,2488.39 1671.38,2492.65 1871.38,2492.65 10844.6,2492.65 9482.4,2539.39 9774.4,2540.39 9611.4,2541.39 9887.4,2547.39 2115.39,2572.64 10398.4,2581.39 1984.39,2592.64 10373.4,2615.39 2275.39,2662.39 1671.39,2692.64 1871.39,2692.64 10844.61,2692.64 2216.39,2706.39 6275.4,2800.39 3716.39,2809.39 4736.4,2813.39 4229.4,2824.39 2020.39,2834.39 9347.4,2843.39 6391.4,2849.39 6894.4,2856.39 8823.4,2858.39 7205.4,2861.39 9875.4,2865.39 5708.4,2867.39 4848.4,2869.39 7397.4,2869.39 3102.39,2871.39 3609.39,2872.39 6673.4,2872.39 4639.4,2876.39 3800.39,2881.39 4114.4,2888.39 1674.39,2893.64 1874.39,2893.64 10847.61,2893.64 9790.4,2908.39 9947.4,2917.39 2011.39,2923.39 9247.4,2924.39 8916.4,2926.39 9445.4,2926.39 2673.39,2930.39 4745.4,2931.39 6787.4,2932.39 3208.39,2933.39 7297.4,2933.39 2130.39,2935.39 3713.39,2936.39 8730.4,2941.39 2272.39,2942.39 5119.4,2945.39 5220.4,2945.39 7893.4,2945.39 8262.4,2946.39 8373.4,2946.39 4236.4,2947.39 7779.4,2948.39 5869.4,2950.39 5731.4,2951.39 2790.39,2953.39 5340.4,2953.39 2561.39,2956.39 6175.4,2972.39 6395.4,2972.39 4835.4,2989.39 6676.4,2989.39 7209.4,2993.39 4632.4,2994.39 3596.39,2996.39 7403.4,2996.39 6899.4,2999.39 3336.39,3007.39 4110.4,3014.39 3824.39,3017.39 4352.4,3018.39 1674.39,3093.64 1874.39,3093.64 10847.61,3093.64 1946.98,3139.11 2346.99,3139.11 2746.99,3139.11 3146.99,3139.11 3546.99,3139.11 3946.99,3139.11 4346.98,3139.11 4746.98,3139.11 5146.98,3139.11 5546.98,3139.11 5946.98,3139.11 6546.99,3139.11 6946.99,3139.11 7346.99,3139.11 7746.99,3139.11 8146.99,3139.11 8547,3139.11 8947,3139.11 9347,3139.11 9747,3139.11 10147,3139.11 10547,3139.11 1946.98,3339.11 2346.99,3339.11 2746.99,3339.11 3146.99,3339.11 3546.99,3339.11 3946.99,3339.11 4346.98,3339.11 4746.98,3339.11 5146.98,3339.11 5546.98,3339.11 5946.98,3339.11 6546.99,3339.11 6946.99,3339.11 7346.99,3339.11 7746.99,3339.11 8146.99,3339.11 8547,3339.11 8947,3339.11 9347,3339.11 9747,3339.11 10147,3339.11 10547,3339.11
IN_U1: C4.1 R7.1 R10.1 U1.3 U1.5 | length 708.6
  Top Layer w10: U1.5@8081.66,2570.39 8077.68,2574.39 v2(8077.7,2606.81) 8077.68,2638.29 R7.1@8089.48,2650.09 ; C4.1@8247.02,2413.89 8252.08,2413.89 8255.77,2417.59 8255.77,2531.59 8268.98,2544.79 U1.3@8310,2544.79 ; R10.1@8303.27,2650.09 8313.88,2639.49 v2(8313.93,2606.81) 8352.48,2606.79 8372.88,2586.39 8372.88,2566.29 8351.48,2544.79 U1.3@8314.88,2544.79
  Bottom Layer w10: v2(8077.7,2606.81) v2(8313.93,2606.81)
IN_U2: C8.1 R17.1 R20.1 U2.3 U2.5 | length 722.6
  Top Layer w10: U2.5@7412.36,2570.39 7408.38,2574.39 v1(7408.4,2606.81) 7408.38,2638.29 R17.1@7420.18,2650.09 ; C8.1@7577.72,2413.89 7588.77,2413.89 7588.77,2527.59 7605.98,2544.79 U2.3@7640.7,2544.8 7693.88,2544.79 7702.77,2553.69 7702.77,2591.49 7687.48,2606.79 7644.68,2606.79 7644.68,2638.29 R20.1@7632.77,2650.09
  Bottom Layer w10: v1(7408.4,2606.81) v1(7644.65,2606.81)
IN_U3: C12.1 R27.1 R30.1 U3.3 U3.5 | length 719.4
  Top Layer w10: U3.5@6743.05,2570.41 6739.07,2574.39 v1(6739.11,2606.81) 6739.07,2638.29 R27.1@6750.98,2650.09 ; C12.1@6908.42,2413.89 6920.77,2413.89 6920.77,2526.59 6938.98,2544.79 U3.3@6971.4,2544.81 7021.27,2544.79 7031.77,2555.29 7031.77,2594.29 7019.27,2606.79 6975.38,2606.79 6975.38,2638.29 R30.1@6963.48,2650.09
  Bottom Layer w10: v1(6739.11,2606.81) v1(6975.34,2606.81)
IN_U4: C16.1 R37.1 R40.1 U4.3 U4.5 | length 716.7
  Top Layer w10: U4.5@6073.77,2570.39 6069.88,2574.29 6069.88,2606.79 6069.88,2638.29 R37.1@6081.68,2650.09 ; C16.1@6239.12,2413.89 6249.77,2413.89 6249.77,2529.59 6264.98,2544.79 U4.3@6302.09,2544.81 6349.18,2544.79 6362.77,2558.39 6362.77,2589.19 6345.07,2606.79 6306.07,2606.79 6306.07,2638.29 R40.1@6294.27,2650.09
  Bottom Layer w10: v1(6069.82,2606.81) v1(6306.05,2606.81)
IN_U5: C20.1 R47.1 R50.1 U5.3 U5.5 | length 698.5
  Top Layer w10: U5.5@4498.98,2570.41 4494.98,2574.39 v2(4495.02,2606.81) 4494.98,2638.29 R47.1@4506.88,2650.09 ; C20.1@4664.32,2413.89 4664.27,2521.09 4687.98,2544.79 4727.38,2544.79 4765.98,2544.79 4781.77,2560.59 4781.77,2589.69 4764.68,2606.79 4731.27,2606.79 4731.27,2638.29 R50.1@4719.48,2650.09
  Bottom Layer w10: v2(4495.02,2606.81) v2(4731.24,2606.81)
IN_U6: C24.1 R57.1 R60.1 U6.3 U6.5 | length 703.6
  Top Layer w10: U6.5@3829.65,2570.41 3825.78,2574.39 3825.78,2606.79 3825.78,2638.29 R57.1@3837.57,2650.09 ; C24.1@3995.02,2413.89 3994.97,2519.89 4019.97,2544.79 U6.3@4058,2544.81 4098.98,2544.79 4115.77,2561.69 4115.77,2589.69 4098.68,2606.79 v1(4061.95,2606.81) 4061.97,2638.29 R60.1@4050.18,2650.09
  Bottom Layer w10: v1(3825.72,2606.81) v1(4061.95,2606.81)
IN_U7: C28.1 R67.1 R70.1 U7.3 U7.5 | length 692.1
  Top Layer w10: U7.5@3160.39,2570.41 v1(3160.41,2606.81) 3160.38,2642.29 R67.1@3168.28,2650.09 ; C28.1@3325.78,2413.89 3325.78,2524.59 3345.97,2544.79 3388.78,2544.79 3430.97,2544.79 3442.78,2556.59 3442.78,2588.69 3424.68,2606.79 v1(3387.78,2606.81) 3387.78,2643.19 R70.1@3380.88,2650.09
  Bottom Layer w10: v1(3160.41,2606.81) v1(3387.78,2606.81)
IN_U8: C32.1 R77.1 R80.1 U8.3 U8.5 | length 701
  Top Layer w10: U8.5@2491.08,2570.42 2487.18,2574.39 2487.18,2606.79 2487.18,2638.29 R77.1@2498.97,2650.09 ; C32.1@2656.47,2413.89 2656.47,2520.29 2680.97,2544.79 2719.47,2544.79 2758.97,2544.79 2774.78,2560.69 2774.78,2590.59 2758.68,2606.79 2720.78,2606.79 2711.57,2618.59 R80.1@2711.57,2650.09
  Bottom Layer w10: v1@2487.15,2606.81 v1(2723.38,2606.81)
  other v1: 2487.14,2606.81
Q1_1: Q1.1 Q2.2 R82.1 | length 155.6
  Top Layer w19.68: R82.1@9514.67,2126.49 9524.58,2136.29 Q1.1@9603.3,2136.33 Q2.2@9603.3,2199.32
Q1_3: D1.2 Q1.3 Q2.3 | length 245.3
  Top Layer w19.68: Q2.3@9701.7,2236.72 Q1.3@9701.7,2098.93 D1.2@9809.2,2098.93
Q3_1: Q3.1 Q4.2 R85.1 | length 155.6
  Top Layer w19.68: R85.1@9002.88,2126.49 9012.77,2136.29 Q3.1@9091.49,2136.33 Q4.2@9091.49,2199.33
Q5_1: Q5.1 Q6.2 R88.1 | length 155.7
  Top Layer w19.68: R88.1@8491.08,2126.49 8500.88,2136.29 Q5.1@8579.68,2136.33 Q6.2@8579.68,2199.33
Q7_1: Q7.1 Q8.2 R91.1 | length 155.7
  Top Layer w19.68: R91.1@7979.27,2126.49 7989.07,2136.29 Q7.1@8067.87,2136.33 Q8.2@8067.87,2199.32
Q9_1: Q9.1 Q10.2 R94.1 | length 155.7
  Top Layer w19.68: R94.1@7467.48,2126.49 7477.27,2136.29 Q9.1@7556.06,2136.33 Q10.2@7556.06,2199.33
Q11_1: Q11.1 Q12.2 R97.1 | length 155.7
  Top Layer w19.68: R97.1@6955.68,2126.49 6965.48,2136.29 7044.27,2136.29 Q12.2@7044.27,2199.29
Q13_1: Q13.1 Q14.2 R100.1 | length 155.7
  Top Layer w19.68: R100.1@6443.88,2126.49 6453.68,2136.29 6532.48,2136.29 Q14.2@6532.48,2199.29
Q15_1: Q15.1 Q16.2 R103.1 | length 155.6
  Top Layer w19.68: R103.1@5932.07,2126.49 5941.88,2136.29 Q15.1@6020.63,2136.33 Q16.2@6020.63,2199.32
Q17_1: Q17.1 Q18.2 R106.1 | length 155.6
  Top Layer w19.68: R106.1@5420.27,2126.49 5430.07,2136.29 Q17.1@5508.82,2136.33 Q18.2@5508.82,2199.32
Q19_1: Q19.1 Q20.2 R109.1 | length 155.6
  Top Layer w19.68: R109.1@4908.38,2126.49 4918.27,2136.29 Q19.1@4997,2136.33 Q20.2@4997.07,2199.29
Q21_1: Q21.1 Q22.2 R112.1 | length 155.9
  Top Layer w19.68: R112.1@4396.57,2126.49 4406.48,2136.39 4485.48,2136.39 Q22.2@4485.2,2199.33
Q23_1: Q23.1 Q24.2 R115.1 | length 155.7
  Top Layer w19.68: R115.1@3884.78,2126.49 3894.57,2136.29 Q23.1@3973.38,2136.33 Q24.2@3973.38,2199.32
Q25_1: Q25.1 Q26.2 R118.1 | length 155.7
  Top Layer w19.68: R118.1@3372.97,2126.49 3382.78,2136.29 Q25.1@3461.57,2136.33 Q26.2@3461.57,2199.32
Q27_1: Q27.1 Q28.2 R121.1 | length 155.7
  Top Layer w19.68: R121.1@2861.18,2126.49 2870.97,2136.29 Q27.1@2949.76,2136.33 Q28.2@2949.76,2199.32
Q29_1: Q29.1 Q30.2 R124.1 | length 155.7
  Top Layer w19.68: R124.1@2349.38,2126.49 2359.18,2136.29 Q29.1@2437.95,2136.33 Q30.2@2437.95,2199.32
Q31_1: Q31.1 Q32.2 R127.1 | length 155.7
  Top Layer w19.68: R127.1@1837.58,2126.49 1847.38,2136.29 1926.17,2136.29 Q32.2@1926.17,2199.29
QD3: J1.1 U12.14 | length 1776.6
  Top Layer w10: U12.14@9101.38,2527.09 9159.58,2527.09 9174.58,2512.09 9174.58,2444.59 9228.77,2390.39 9825.88,2390.39 10168.88,2733.39 10333.38,2733.39 10508.88,2908.89 J1.1@10567.08,2908.89
QD4: U12.9 U13.14 | length 3713.2
  Top Layer w10: U13.14@5518.65,2527.09 5572.57,2527.09 v1@5665.98,2433.69 ; v1@8952.98,2592.69 9015.38,2654.99 U12.9@9101.38,2654.99
  Bottom Layer w10: v1(5666.01,2433.64) 5740.58,2433.57 5868.58,2561.57 8500.28,2561.57 8531.28,2592.67 v1@8952.98,2592.67
  other v1: 8952.97,2592.64
R2_2: C3.2 D18.2 R2.2 | length 1651.4
  Top Layer w39.37: C3.2@8006.83,2728.89 8047.77,2728.89 R2.2@8089.48,2728.89
  Bottom Layer w10: v2(8048.18,2732.8) 8277.73,2732.8 8342.57,2797.64 9464.61,2797.64 D18.2@9553.3,2886.34
R3_2: R3.2 R4.1 U1.2 | length 229.9
  Top Layer w10: U1.2@8310,2519.19 8349.77,2519.19 8359.27,2528.59 8396.27,2528.59 8420.48,2504.39 R4.1@8432.08,2504.39
  Top Layer w39.37: R4.1@8431.98,2504.49 8439.88,2496.59 R3.2@8439.88,2413.89
R4_2: C2.2 R4.2 R8.2 | length 230.4
  Top Layer w10: R4.2@8431.98,2559.59 8384.77,2606.79 8384.77,2650.09 8384.77,2678.09 8395.98,2689.19 8427.88,2689.19 8439.88,2701.29 C2.2@8439.93,2728.89
R5_1: C3.1 R5.1 R9.2 | length 227.8
  Top Layer w10: C3.1@7951.72,2728.89 7951.68,2703.99 7966.07,2689.59 7993.68,2689.59 8006.77,2676.49 8006.77,2650.09 8006.77,2606.79 R5.1@7959.57,2559.59
R6_1: R5.2 R6.1 U1.6 | length 237.6
  Top Layer w10: R5.2@7959.57,2504.49 8000.27,2504.49 8040.57,2544.79 U1.6@8086.57,2544.79
  Top Layer w39.37: R6.1@7951.68,2413.89 7951.68,2496.59 R5.2@7959.57,2504.49
R18_2: C6.2 R14.2 R18.2 | length 232.8
  Top Layer w10: R14.2@7762.68,2559.59 7715.48,2606.79 7715.48,2650.09 7715.48,2678.99 7725.77,2689.29 7761.77,2689.29 7770.57,2698.09 C6.2@7770.63,2728.89
R28_2: C10.2 R24.2 R28.2 | length 232.2
  Top Layer w10: R24.2@7093.48,2559.59 7046.18,2606.79 7046.18,2650.09 7046.18,2678.69 7056.77,2689.29 7091.77,2689.29 7101.27,2698.79 C10.2@7101.33,2728.89
R38_2: C14.2 R34.2 R38.2 | length 232.1
  Top Layer w10: R34.2@6424.18,2559.59 6376.88,2606.79 6376.88,2650.09 6376.88,2678.19 6388.38,2689.59 6423.07,2689.59 6431.98,2698.59 C14.2@6432.03,2728.89
R48_2: C18.2 R44.2 R48.2 | length 232.2
  Top Layer w10: R44.2@4849.38,2559.59 4802.07,2606.79 4802.07,2650.09 4802.07,2681.89 4809.77,2689.69 4844.77,2689.69 4857.18,2702.09 C18.2@4857.23,2728.89
R58_2: C22.2 R54.2 R58.2 | length 229.2
  Top Layer w10: R54.2@4180.07,2559.59 4132.88,2606.79 4132.88,2650.09 4132.88,2677.69 4143.77,2688.69 4173.77,2688.69 4187.98,2702.79 C22.2@4187.98,2728.89